# Altium PCB PCB1.PcbDoc
Units mm, origin at the board's own origin, x right, y up, seen from the top; angles counter-clockwise.
Board outline 98.75 x 115 mm, 2 copper layers (Top Layer, Bottom Layer), stack 1.671 mm thick; 18 components, 22 nets, 85 pads, 37 vias.
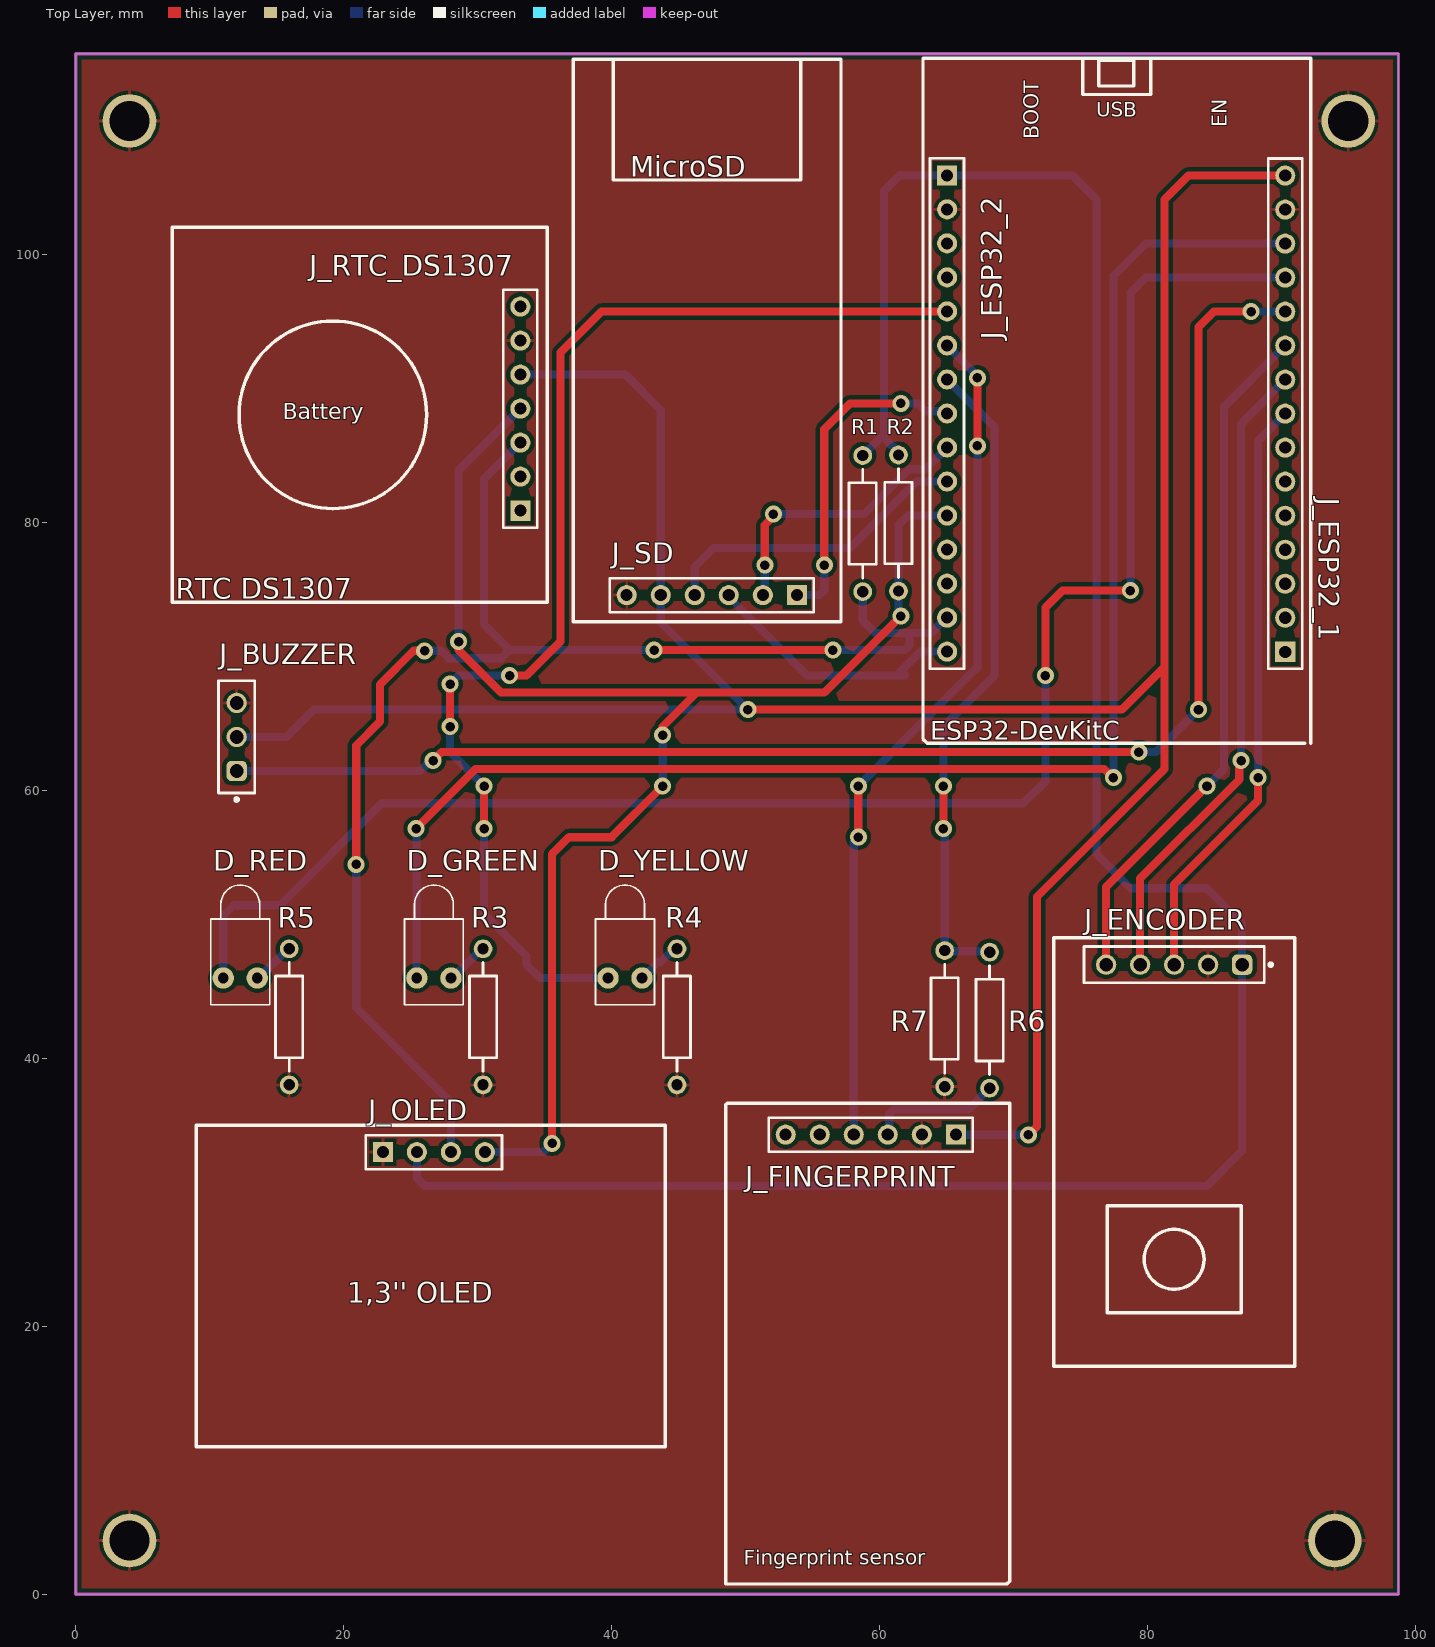
[diagram p0: Top Layer view]
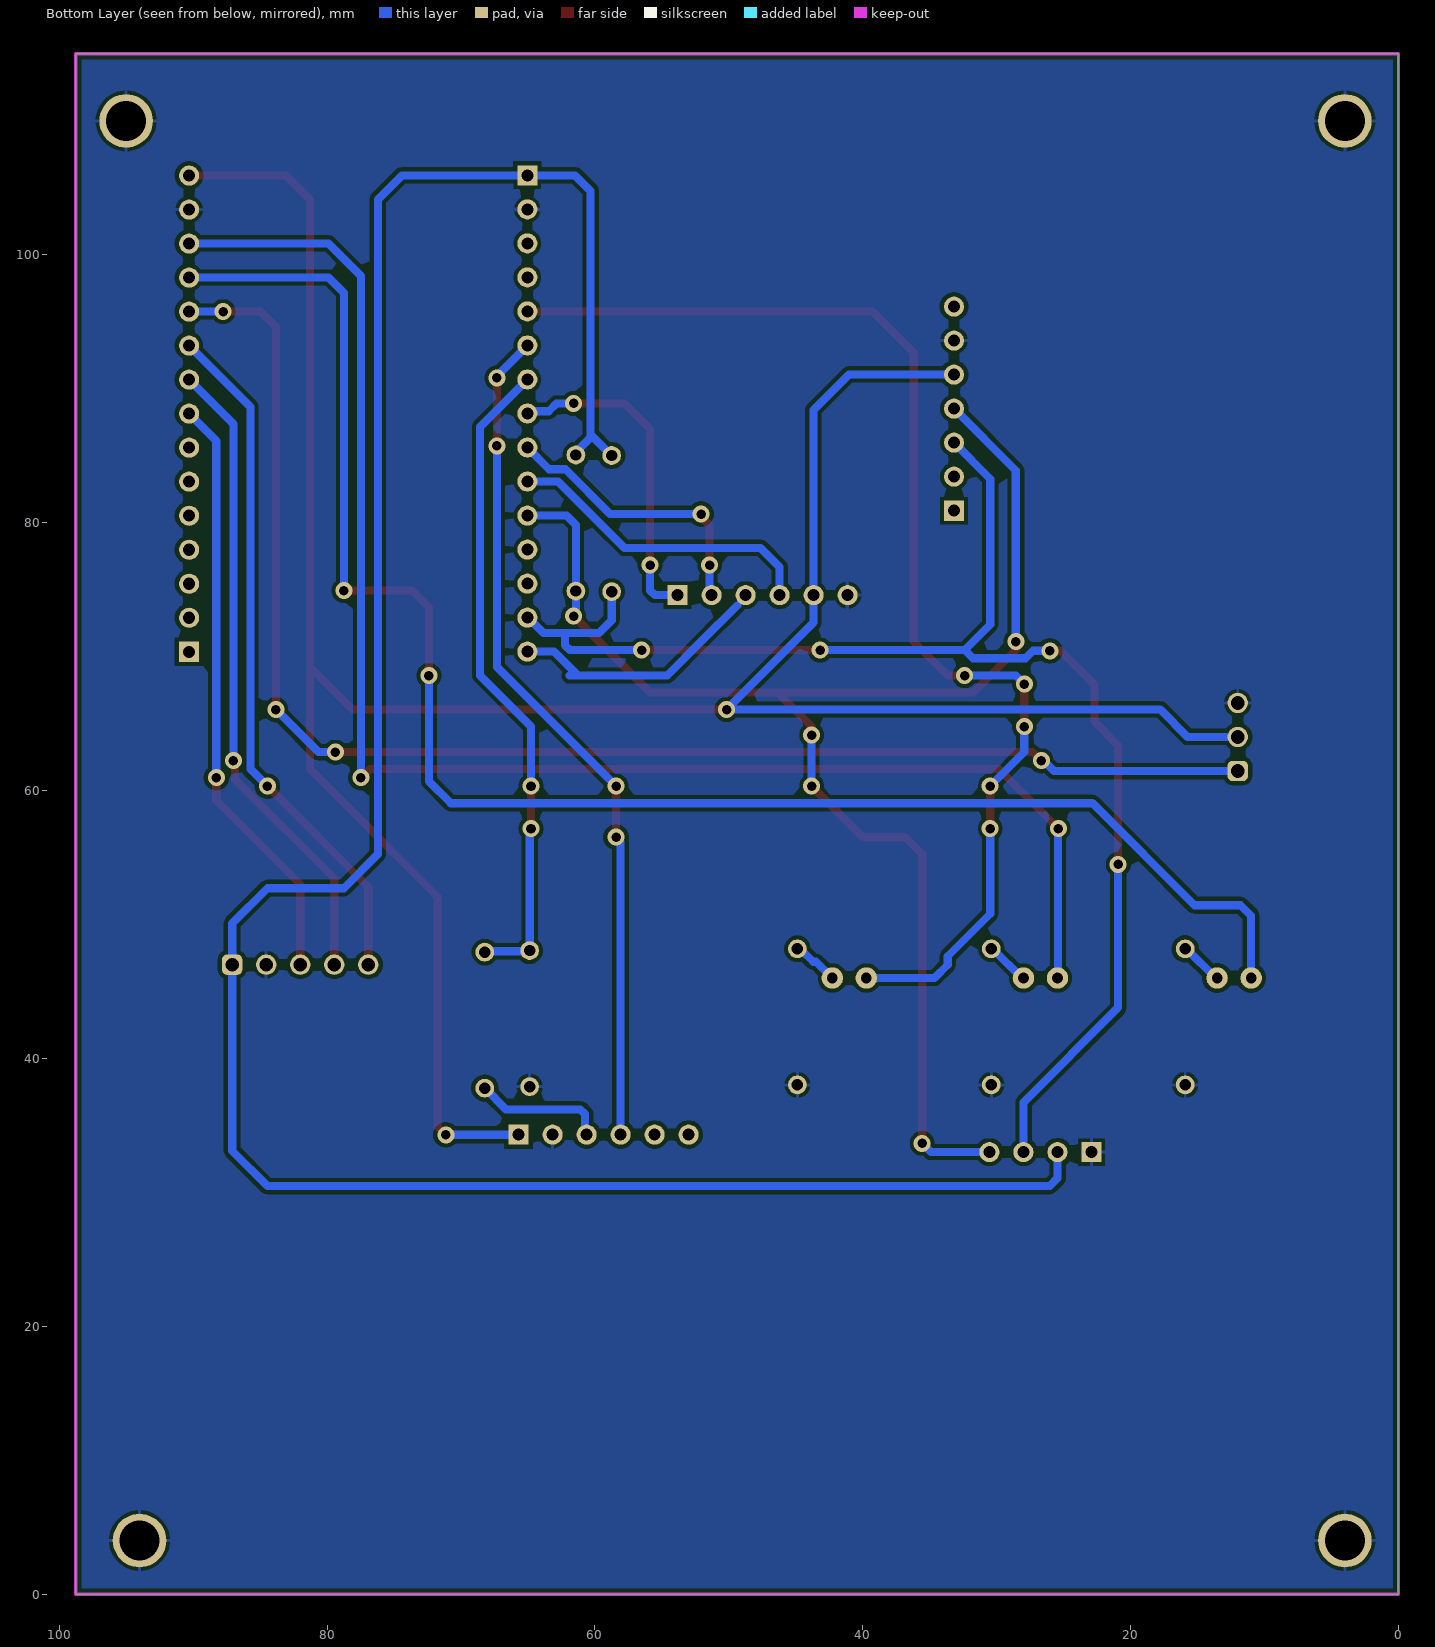
[diagram p1: Bottom Layer view, seen from below]

## Layer stack, top to bottom
Top Solder: solder mask 0.0102, Solder Resist, Dk 3.5
Top Layer: signal copper 0.0356
Dielectric 1: dielectric 1.6002, FR-4, Dk 4.8
Bottom Layer: signal copper 0.0356
Bottom Solder: solder mask 0.0102, Solder Resist, Dk 3.5

## Board outline
0,0 0,115 98.75,115 98.75,0

## Design rules (kind name [scope] priority, off if disabled: settings)
Clearance [All] p1: gap=0.305 ignorepadtopadclearanceinfootprint=FALSE
HoleSize [All] p1: absolutevalues=TRUE maxlimit=3.54 minlimit=0.025 maxpercent=80.000 minpercent=20.000
PolygonConnect [All] p1: connectstyle=Relief reliefconductorwidth=0.254 reliefentries=4 polygonreliefangle="90 Angle" airgapwidth=0.254
RoutingVias [All] p1: holewidth=0.711 width=1.27 viastyle="Through Hole" minholewidth=0.711 minwidth=1.27 maxholewidth=0.711 maxwidth=1.27
SilkToSilkClearance [All] p1: silktosilkclearance=0
SilkToSolderMaskClearance [IsPad] p1: minsilkscreentomaskgap=0 clearancetoexposedcopper=TRUE
SolderMaskExpansion [All] p1: expansion=0.102 istentingtop=FALSE
SupplyNets "Schematic Supply Nets_1" [InNet('GND')] p1: voltage=0.000
Width Width_Power [InNet('GND') OR InNet('V5V0') OR InNet('V3V3')] p1: maxlimit=1.499 minlimit=0.61 preferedwidth=0.787
Width [All] p2: maxlimit=1.016 minlimit=0.305 preferedwidth=0.406
27 further rules are at their usual default settings.

## Components (designator, comment, footprint, x,y, rotation, side; value= is the part's Value field where it differs from the comment)
D_GREEN "LED_GREEN" LED-1 26.73,46 r90 top
D_RED "LED1" LED-1 12.27,46 r90 top
D_YELLOW "LED1" LED-1 41,46 r90 top
J_BUZZER "FHDR1x3" 61300311821 12,64 r90 top
J_ENCODER "FHDR1x5" 61300511821 82,47 r180 top
J_ESP32_1 "FHDR1x15" HDR1X15 90.297,70.358 r90 top
J_ESP32_2 "FHDR1x15" HDR1X15 65.045,105.931 r270 top
J_FINGERPRINT "FHDR1x6" HDR1X6 65.699,34.305 r180 top
J_OLED "FHDR1x4" HDR1X4 22.92,33 r0 top
J_RTC_DS1307 "FHDR1x7" HDR1X7 33.186,80.892 r90 top
J_SD "FHDR1x6" HDR1X6 53.827,74.588 r180 top
R1 "Res2" AXIAL-0.4 58.746,79.933 r90 top value=4K7
R2 "Res2" AXIAL-0.4 61.418,79.973 r90 top value=4K7
R3 "Res2" AXIAL-0.4 30.4,43.1 r90 top value=1K2
R4 "Res2" AXIAL-0.4 44.878,43.1 r90 top value=1K2
R5 "Res2" AXIAL-0.4 15.922,43.1 r90 top value=1K2
R6 "Res2" AXIAL-0.4 68.219,42.855 r90 top value=2K2
R7 "Res2" AXIAL-0.4 64.868,42.971 r90 top value=4K7

## Footprints (in the part's own frame and the unit in brackets; to place one, negate y for a bottom-side part, rotate by r counter-clockwise, add the part's x,y. Pads: shape width x height; smd on the part's side, far side on the other; paste and mask are expansions set on the pad)
61300311821 [mm] "Socket Header, Pitch 2.54 mm, THT, Vertical, single row, 3p"
  rrect50% 1.52x1.52 hole 1.02: 1(-2.54,0)
  round 1.52 hole 1.02: 2(0,0) 3(2.54,0)
  silkscreen extent -4.79,-1.35 4.18,1.35, body extent -4.06,-1.25 4.06,1.25, height 8.55
61300511821 [mm] "Socket Header, Pitch 2.54 mm, THT, Vertical, single row, 5p"
  rrect50% 1.52x1.52 hole 1.02: 1(-5.08,0)
  round 1.52 hole 1.02: 2(-2.54,0) 3(0,0) 4(2.54,0) 5(5.08,0)
  silkscreen extent -7.34,-1.35 6.73,1.35, body extent -6.6,-1.25 6.6,1.25, height 8.55
AXIAL-0.4 [mm] "Axial Device, Thru-Hole; 2 Leads; 0.4 in Pin Spacing"
  round 1.4 hole 0.85: 1(-5.08,0) 2(5.08,0)
  silkscreen extent -4.06,-1.02 4.06,1.02
HDR1X4 [mm] "Connector; Header; 4 Position"
  rect 1.5x1.5 hole 0.9: 1(0,0)
  round 1.5 hole 0.9: 2(2.54,0) 3(5.08,0) 4(7.62,0)
  silkscreen extent -1.27,-1.27 8.89,1.27
HDR1X6 [mm] "Connector; Header; 6 Position"
  rect 1.5x1.5 hole 0.9: 1(0,0)
  round 1.5 hole 0.9: 2(2.54,0) 3(5.08,0) 4(7.62,0) 5(10.16,0) 6(12.7,0)
  silkscreen extent -1.27,-1.27 13.97,1.27
HDR1X7 [mm] "Connector; Header; 7 Position"
  rect 1.5x1.5 hole 0.9: 1(0,0)
  round 1.5 hole 0.9: 2(2.54,0) 3(5.08,0) 4(7.62,0) 5(10.16,0) 6(12.7,0) 7(15.24,0)
  silkscreen extent -1.27,-1.27 16.51,1.27
HDR1X15 [mm] "Connector; Header; 15 Position"
  rect 1.5x1.5 hole 0.9: 1(0,0)
  round 1.5 hole 0.9: 2(2.54,0) 3(5.08,0) 4(7.62,0) 5(10.16,0) 6(12.7,0) 7(15.24,0) 8(17.78,0) 9(20.32,0) 10(22.86,0) 11(25.4,0) 12(27.94,0) 13(30.48,0) 14(33.02,0) 15(35.56,0)
  silkscreen extent -1.27,-1.27 36.83,1.27
LED-1 [mm] "LED; 2 Leads"
  round 1.6 hole 0.8: 1(0,1.27) 2(0,-1.27)
  silkscreen extent -2,-2.2 6.95,2.2

## Part data
D_GREEN: library part LED1, "Typical RED GaAs LED", LatestRevisionDate=08-Jul-2005, LatestRevisionNote="Mech Layer 1 removed.", PackageDescription="LED; 2 Leads", PackageReference=LED-1, Published=8-Jun-2000, Publisher="Altium Limited"
D_RED D_YELLOW: "Typical RED GaAs LED", LatestRevisionDate=08-Jul-2005, LatestRevisionNote="Mech Layer 1 removed.", PackageDescription="LED; 2 Leads", PackageReference=LED-1, Published=8-Jun-2000, Publisher="Altium Limited"
J_BUZZER: library part CMP-1502-01315-4, "Btb Conn, Rcpt, 3Pos, 1Row, 2.54Mm Rohs Compliant: Yes", Contact Resistance=20mΩ, Current Rating=3A, Operating Supply Voltage=250V, Gender=Female, Lead Pitch=2.54mm, Number of Pins=3, Orientation=Vertical, RoHS=Non-Compliant
J_ENCODER: library part CMP-1502-01320-4, "THT Vertical Socket Header WR-PHD, Pitch 2.54 mm, Single Row, 5 pins", Contact Resistance=20mΩ, Current Rating=3A, Operating Supply Voltage=250V, Gender=Female, Lead Pitch=2.54mm, Number of Pins=5, Orientation=Vertical
J_ESP32_1 J_ESP32_2: library part 315-83-115-41-003101, "15 Position Socket Connector 0.100\" (2.54mm) Through Hole Gold", Manufacturer_Name=Preci-Dip, Datasheet Link=https://www.precidip.com/pview/315-PP-1NN-41-003101.html?hkey=EF798316E3902B6ED9A73243A3159BB0, Geometry.Height=2.41mm, Manufacturer_Part_Number=315-83-115-41-003101
J_FINGERPRINT J_SD: library part "Header 6", "Header, 6-Pin", LatestRevisionDate=17-Jul-2002, LatestRevisionNote="Re-released for DXP Platform.", Publisher="Altium Limited"
J_OLED: library part "Header 4", "Header, 4-Pin", LatestRevisionDate=17-Jul-2002, LatestRevisionNote="Re-released for DXP Platform.", Publisher="Altium Limited"
J_RTC_DS1307: library part "Header 7", "Header, 7-Pin", LatestRevisionDate=17-Jul-2002, LatestRevisionNote="Re-released for DXP Platform.", Publisher="Altium Limited"
R1 R2 R3 R4 R5 R6 R7: "Resistor", LatestRevisionDate=17-Jul-2002, LatestRevisionNote="Re-released for DXP Platform.", PackageDescription="Axial Device, Thru-Hole; 2 Leads; 0.4 in Pin Spacing", PackageReference=AXIAL-0.4, Published=8-Jun-2000, Publisher="Altium Limited"

## Free pads (board coordinates)
  round 4 hole 3: 2(95,110) 3(94,4) 4(4,4) 5(4,110)

## Via types
v1: diameter 1.27, hole 0.711, Top Layer to Bottom Layer, 37 vias

## Nets (pads, with @x,y where several pads share a name; then routed paths per layer and width w, separated by ;. In a path a pad name is that pad's centre, name@x,y a point inside that pad or via, vN(x,y) a via of type N, cw(c..) or ccw(c..) an arc to the next point about the centre after c; other vN are vias at no path point)
BUZZER_SIG: J_BUZZER.1 J_ESP32_1.11 | length 109.2
  Top Layer w0.61: v1(26.67,62.23) 27.305,62.865 v1(79.375,62.865) ; v1(83.82,66.04) 83.82,94.615 84.963,95.758 v1(87.757,95.758)
  Bottom Layer w0.61: J_BUZZER.1 25.721,61.46 26.491,62.23 v1(26.67,62.23) ; v1(79.375,62.865) 80.645,62.865 v1(83.82,66.04) ; v1(87.757,95.758) J_ESP32_1.11
ENC_SIA: J_ENCODER.5 J_ESP32_1.10 | length 51.8
  Top Layer w0.61: J_ENCODER.5 76.92,52.79 v1(84.455,60.325)
  Bottom Layer w0.61: v1(84.455,60.325) 85.725,61.595 85.725,88.646 J_ESP32_1.10
ENC_SIB: J_ENCODER.4 J_ESP32_1.9 | length 48.2
  Top Layer w0.61: J_ENCODER.4 79.46,53.425 86.869,60.834 86.869,62.104 v1(86.995,62.23)
  Bottom Layer w0.61: v1(86.995,62.23) 86.995,87.376 J_ESP32_1.9
ENC_SW: J_ENCODER.3 J_ESP32_1.8 | length 44.6
  Top Layer w0.61: J_ENCODER.3 82,52.983 88.265,59.248 v1(88.265,60.96)
  Bottom Layer w0.61: v1(88.265,60.96) 88.265,86.106 J_ESP32_1.8
FP_RX: J_ESP32_2.7 R6.2 R7.2 | length 49.1
  Top Layer w0.61: v1(64.77,57.15) v1(64.77,60.325)
  Bottom Layer w0.61: v1(64.77,57.15) 64.868,57.052 R7.2 64.926,47.993 68.161,47.993 R6.2 ; v1(64.77,60.325) 64.77,64.77 68.58,68.58 68.58,87.156 J_ESP32_2.7
FP_TX: J_ESP32_2.6 J_FINGERPRINT.4 | length 63.7
  Top Layer w0.61: v1(58.42,56.515) v1(58.42,60.325) ; v1(67.31,85.725) v1(67.31,90.805)
  Bottom Layer w0.61: J_FINGERPRINT.4 58.079,56.174 v1(58.42,56.515) ; v1(58.42,60.325) 67.31,69.215 v1(67.31,85.725) ; J_ESP32_2.6 67.31,90.966 v1(67.31,90.805)
GND: J_BUZZER.3 J_ENCODER.2 J_ESP32_1.14 J_ESP32_2.2 J_FINGERPRINT.2 J_OLED.1 J_RTC_DS1307.6 J_SD.6 pad.2 pad.3 pad.4 pad.5 R3.1 R4.1 R5.1 R7.1
I2C_SCL: J_ESP32_2.14 J_OLED.3 J_RTC_DS1307.3 R1.1 | length 107.4
  Top Layer w0.61: v1(20.93,54.483) 20.93,63.373 22.708,65.151 22.708,67.92 25.222,70.434 v1(26.035,70.434) ; v1(43.18,70.485) v1(56.515,70.485)
  Bottom Layer w0.61: v1(20.93,54.483) 20.93,43.79 28,36.719 J_OLED.3 ; v1(26.035,70.434) 27.283,70.434 27.842,69.875 31.775,69.875 32.385,70.485 ; J_RTC_DS1307.3 30.48,83.266 30.48,72.39 32.385,70.485 ; v1(43.18,70.485) 32.385,70.485 ; v1(56.515,70.485) 61.873,70.485 62.23,70.842 62.23,71.755 ; R1.1 58.746,72.699 59.69,71.755 62.23,71.755 ; J_ESP32_2.14 65.002,72.911 63.846,71.755 62.23,71.755
I2C_SDA: J_ESP32_2.11 J_OLED.4 J_RTC_DS1307.4 R2.1 | length 112.7
  Top Layer w0.61: v1(28.575,71.12) 28.575,70.485 31.75,67.31 46.355,67.31 ; v1(35.56,33.655) 35.56,55.245 36.83,56.515 40.005,56.515 v1(43.815,60.325) ; v1(43.815,64.135) 43.815,64.77 46.355,67.31 ; v1(61.595,73.025) 55.88,67.31 46.355,67.31
  Bottom Layer w0.61: v1(28.575,71.12) 28.575,83.901 J_RTC_DS1307.4 ; J_OLED.4 34.905,33 v1(35.56,33.655) ; v1(43.815,60.325) v1(43.815,64.135) ; v1(61.595,73.025) 61.418,73.202 R2.1 61.418,79.833 62.116,80.531 J_ESP32_2.11
LED_GREEN: D_GREEN.1 J_ESP32_1.13 | length 116.6
  Top Layer w0.61: v1(25.4,57.15) 29.845,61.595 76.783,61.595 77.418,60.96 v1(77.47,60.96)
  Bottom Layer w0.61: v1(25.4,57.15) 25.43,57.12 25.43,46.03 D_GREEN.1 ; v1(77.47,60.96) 77.47,98.425 79.883,100.838 J_ESP32_1.13
LED_RED: D_RED.1 J_ESP32_1.12 | length 124.3
  Top Layer w0.61: v1(72.39,68.58) 72.39,73.66 73.66,74.93 v1(78.74,74.93)
  Bottom Layer w0.61: D_RED.1 11,50.648 11.787,51.435 15.24,51.435 22.86,59.055 70.763,59.055 72.39,60.682 v1(72.39,68.58) ; v1(78.74,74.93) 78.74,97.155 79.883,98.298 J_ESP32_1.12
LED_YELLOW: D_YELLOW.1 J_ESP32_2.5 | length 91.1
  Top Layer w0.61: v1(27.94,64.77) v1(27.94,67.945) ; v1(30.48,57.15) v1(30.48,60.325) ; v1(32.385,68.58) 33.655,68.58 36.195,71.12 36.195,92.71 39.256,95.771 J_ESP32_2.5
  Bottom Layer w0.61: v1(27.94,64.77) 27.94,62.865 v1(30.48,60.325) ; v1(27.94,67.945) 28.575,68.58 v1(32.385,68.58) ; v1(30.48,57.15) 30.48,50.8 33.655,47.625 33.655,46.99 34.645,46 D_YELLOW.1
NetD_GREEN_2: D_GREEN.2 R3.2 | length 3.3
  Bottom Layer w0.61: D_GREEN.2 28.11,46 30.29,48.18 R3.2
NetD_RED_2: D_RED.2 R5.2 | length 3.3
  Bottom Layer w0.61: D_RED.2 13.641,46 15.821,48.18 R5.2
NetD_YELLOW_2: D_YELLOW.2 R4.2 | length 3.5
  Bottom Layer w0.61: D_YELLOW.2 43.483,47.213 43.697,47.213 44.664,48.18 R4.2
NetJ_FINGERPRINT_3: J_FINGERPRINT.3 R6.1 | length 9.9
  Bottom Layer w0.61: J_FINGERPRINT.3 60.735,34.421 60.735,35.838 61.092,36.195 66.639,36.195 R6.1
SD_CS: J_ESP32_2.8 J_SD.1 | length 24.5
  Top Layer w0.61: v1(55.88,76.835) 55.88,86.995 57.785,88.9 v1(61.595,88.9)
  Bottom Layer w0.61: J_SD.1 55.523,74.588 55.88,74.945 v1(55.88,76.835) ; v1(61.595,88.9) 62.865,88.9 63.444,88.321 64.875,88.321 J_ESP32_2.8
SPI_CLK: J_ESP32_2.9 J_SD.2 | length 21.4
  Top Layer w0.61: v1(51.435,76.835) 51.435,79.831 52.07,80.466 v1(52.07,80.645)
  Bottom Layer w0.61: J_SD.2 51.435,74.736 v1(51.435,76.835) ; v1(52.07,80.645) 58.862,80.645 62.203,83.985 63.42,83.985 J_ESP32_2.9
SPI_MISO: J_ESP32_2.10 J_SD.4 | length 23.6
  Bottom Layer w0.61: J_SD.4 46.207,76.687 47.625,78.105 57.785,78.105 62.751,83.071 J_ESP32_2.10
SPI_MOSI: J_ESP32_2.15 J_SD.3 | length 19.2
  Bottom Layer w0.61: 49.371,73.819 52.07,71.12 54.599,68.591 ; 54.61,68.58 61.896,68.58 ; 61.261,68.58 63.052,70.371 J_ESP32_2.15
V3V3: J_ENCODER.1 J_ESP32_2.1 J_OLED.2 R1.2 R2.2 | length 183.3
  Bottom Layer w0.61: J_OLED.2 25.46,31.055 26.035,30.48 84.455,30.48 87.08,33.105 J_ENCODER.1 87.08,50.08 84.455,52.705 78.74,52.705 76.2,55.245 76.2,104.14 74.409,105.931 J_ESP32_2.1 61.481,105.931 60.325,104.775 60.325,86.592 ; R1.2 60.325,86.592 ; R2.2 61.418,85.267 61.023,85.662 60.325,86.36 60.325,86.592
V5V0: J_BUZZER.2 J_ESP32_1.15 J_FINGERPRINT.1 J_RTC_DS1307.5 J_SD.5 | length 197.3
  Top Layer w0.61: v1(50.165,66.04) 78.105,66.04 81.28,69.215 ; v1(71.12,34.29) 71.755,34.925 71.755,52.07 81.28,61.595 81.28,69.215 ; J_ESP32_1.15 83.058,105.918 81.28,104.14 81.28,69.215
  Bottom Layer w0.61: J_BUZZER.2 15.74,64 17.78,66.04 v1(50.165,66.04) 43.667,72.538 J_SD.5 43.667,88.413 41.028,91.052 J_RTC_DS1307.5 ; J_FINGERPRINT.1 65.706,34.297 71.113,34.297 v1(71.12,34.29)
pads on no net: J_ESP32_1.1 J_ESP32_1.2 J_ESP32_1.3 J_ESP32_1.4 J_ESP32_1.5 J_ESP32_1.6 J_ESP32_1.7 J_ESP32_2.3 J_ESP32_2.4 J_ESP32_2.12 J_ESP32_2.13 J_FINGERPRINT.5 J_FINGERPRINT.6 J_RTC_DS1307.1 J_RTC_DS1307.2 J_RTC_DS1307.7

## Polygon pours and split planes (outlines as drawn)
GND on Bottom Layer "Ground" (solid, pour order 2): 0,114.986 98.755,114.986 98.73,114.96 98.73,0.025 0.025,0.025 0,0
GND on Top Layer "Ground" (solid, pour order 1): 0,114.986 98.755,114.986 98.755,0.025 98.73,0 0,0

## Keep-outs
Keep-Out Layer:
  lines w0.254: 0,0 5,0 94.25,0 97.75,0 98.75,0 98.75,110 98.75,115 97.75,115 0,115 0,0

## Silkscreen, mask and mechanical layers (free items; w line width, h text height)
Top Overlay:
  circle w0.254: c19.186,88.052 r7
  circle w0.254: c82,25 r2.236
  lines w0.254: 40.127,114.588 40.127,105.588 54.127,105.588 54.127,114.588 ; 75.164,114.508 75.164,112.603 75.164,111.968 80.244,111.968 80.244,114.508 ; 76.358,112.603 76.358,114.508 78.898,114.508 ; 76.434,112.603 78.974,112.603 78.974,114.508 ; 91.746,63.534 63.56,63.534 63.246,63.848 63.246,114.682 65.022,114.682 90.422,114.682 91.746,114.682 92.201,114.682 ; 92.202,63.533 92.202,114.681 ; 73,17 73,49 90,49 91,49 91,17 73,17 ; 73,17 73,17 ; 7.186,74.052 7.186,102.052 35.186,102.052 35.186,74.052 7.186,74.052 ; 9,11 9,35 44,35 44,11 9,11 ; 37.127,72.588 57.127,72.588 57.127,114.588 38.127,114.588 37.127,114.588 37.127,72.588 ; 48.519,0.755 69.519,0.755 69.719,0.955 69.719,36.655 48.619,36.655 48.519,36.555 48.519,0.755 ; 77,21 77,29 87,29 87,21 77,21
  text "USB" at 76.18,110.317 h1.1
  text "EN" at 85.934,109.53 h1.12 r90
  text "BOOT" at 71.887,108.615 h1.12 r90
  text "MicroSD" at 41.381,105.842 h1.52
  text "Battery" at 15.44,87.706 h1.2
  text "RTC DS1307" at 7.44,74.306 h1.52
  text "ESP32-DevKitC" at 63.801,63.802 h1.4
  text "1,3'' OLED" at 20.254,21.762 h1.52
  text "Fingerprint sensor" at 49.873,2.176 h1.1